# Altium PCB Full bridge-V1.00.PcbDoc (part 1 of 2)
Units mil, origin at the board's own origin, x right, y up, seen from the top; angles counter-clockwise.
Board outline 14960.63 x 6692.91 mil, 2 copper layers (Top Layer, Bottom Layer); 452 components, 175 nets, 980 pads, 0 vias.
Unrouted connection lines stored in the file: 781.
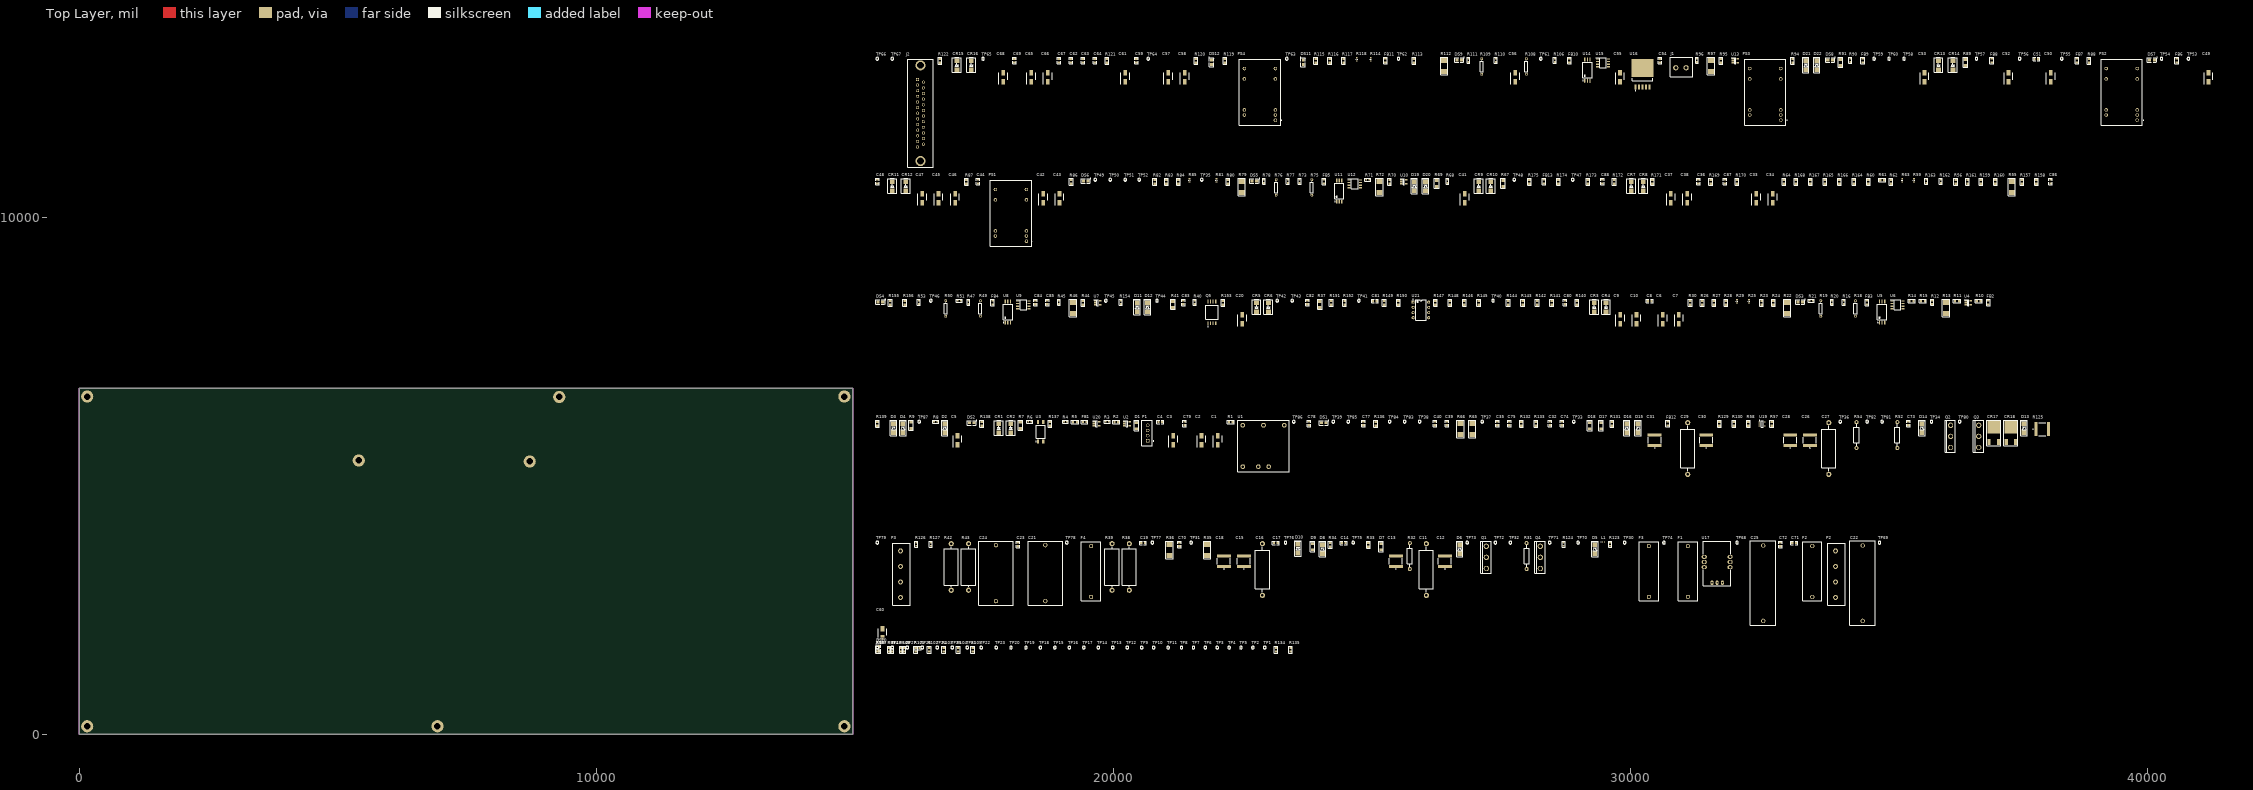
[diagram p0: Top Layer view]
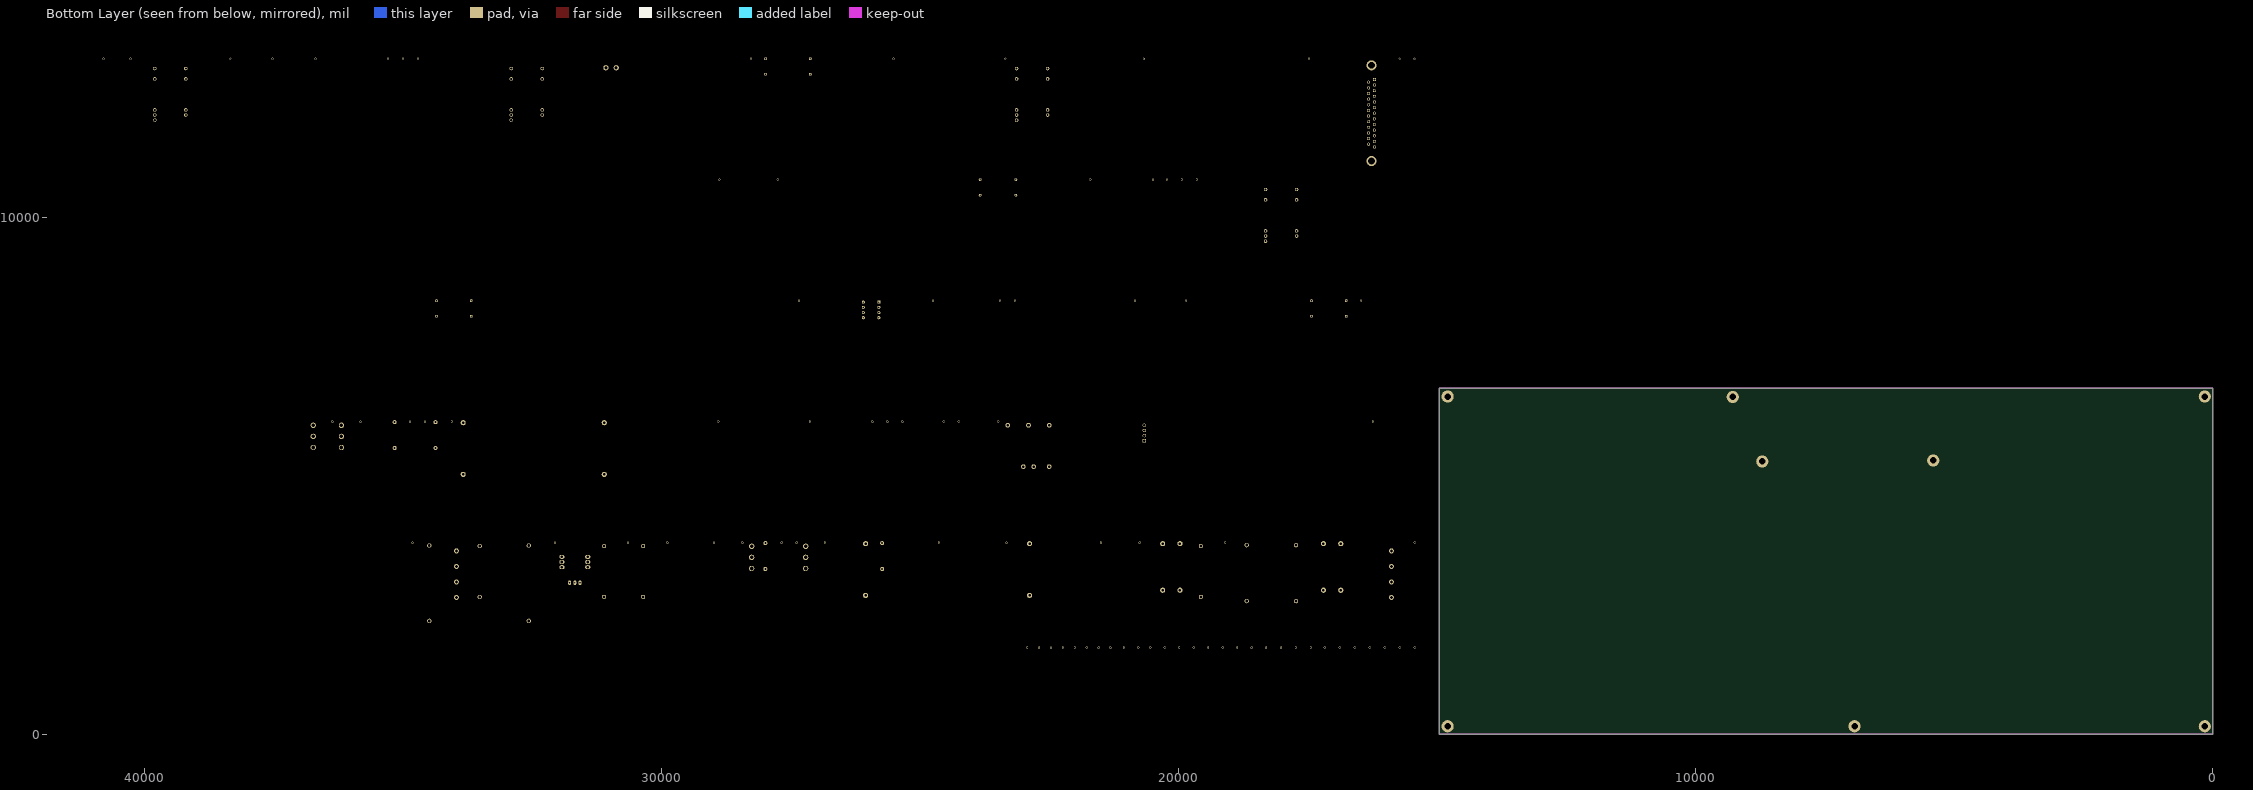
[diagram p1: Bottom Layer view, seen from below]

## Layer stack, top to bottom
Top Solder: solder mask 0.4, Solder Resist, Dk 3.5
Top Layer: signal copper 1.4
Dielectric 1: dielectric 12.6, FR-4, Dk 4.8
Bottom Layer: signal copper 1.4
Bottom Solder: solder mask 0.4, Solder Resist, Dk 3.5

## Board outline
0,0 0,6692.91 14960.63,6692.91 14960.63,0

## Design rules (kind name [scope] priority, off if disabled: settings)
Clearance [All] p1: gap=10 ignorepadtopadclearanceinfootprint=FALSE except(0: Arc-Hole Track-Hole SMDPad-Hole THPad-Hole Via-Hole Fill-Hole Poly-Hole Region-Hole Text-Hole)
PolygonConnect [All] p1: connectstyle=Relief reliefconductorwidth=10 reliefentries=4 polygonreliefangle="90 Angle" airgapwidth=10
RoutingVias [All] p1: holewidth=28 width=50 viastyle="Through Hole" minholewidth=28 minwidth=50 maxholewidth=28 maxwidth=50
SolderMaskExpansion [All] p1: expansion=4 istentingtop=FALSE
Width [All] p1: maxlimit=10 minlimit=10 preferedwidth=10
30 further rules are at their usual default settings.

## Components (designator, comment, footprint, x,y, rotation, side; value= is the part's Value field where it differs from the comment)
C1 "Cap Pol2" CAPAE430X565N 22025,5690 r90 top value=10uF
C2 "Cap Pol2" CAPAE430X565N 21710,5690 r90 top value=10uF
C3 "Cap Pol2" CAPAE430X565N 21165,5690 r90 top value=10uF
C4 "Cap" C0805 20915,6045 r0 top value=10uF-16V
C5 "Cap Pol2" CAPAE430X565N 16990,5690 r90 top value=10uF
C6 "Cap Pol2" CAPAE430X565N 30630,8030 r90 top value=10uF
C7 "Cap Pol2" CAPAE430X565N 30945,8030 r90 top value=10uF
C8 "10uF-50V" C0805 30380,8385 r0 top
C9 "Cap Pol2" CAPAE430X565N 29810,8030 r90 top value=10uF
C10 "Cap Pol2" CAPAE430X565N 30125,8030 r90 top value=10uF
C11 "PWS2101330*D" PWS2101330KD 26060,3190 r90 top
C12 "C2225X103KGRACTU 10n 2000v" C2225_FT 26420,3350 r90 top
C13 "C2225X103KGRACTU 10n 2000v" C2225_FT 25470,3350 r90 top
C14 "10uF-50V" C0805 24460,3705 r0 top
C15 "C2225X103KGRACTU 10n 2000v" C2225_FT 22530,3350 r90 top
C16 "PWS2101330*D" PWS2101330KD 22890,3190 r90 top
C17 "10uF-50V" C0805 23150,3705 r0 top
C18 "C2225X103KGRACTU 10n 2000v" C2225_FT 22145,3350 r90 top
C19 "10uF-50V" C0805 20580,3705 r0 top
C20 "Cap Pol2" CAPAE430X565N 22500,8030 r90 top value=10uF
C21 "MKP1J041006G00KYSD 1uF 630V" MKP10_31x17-P27.5mm 18690,3120 r90 top
C22 "MKP1841410135 0.1uF 1.6kV" MKP1841410135 34500,2925 r90 top
C23 "10uF-50V" C0805 18160,3675 r90 top
C24 "MKP1J041006G00KYSD 1uF 630V" MKP10_31x17-P27.5mm 17735,3120 r90 top
C25 "MKP1841410135 0.1uF 1.6kV" MKP1841410135 32575,2925 r90 top
C26 "C2225X103KGRACTU 10n 2000v" C2225_FT 33480,5690 r90 top
C27 "PWS2101330*D" PWS2101330KD 33845,5530 r90 top
C28 "C2225X103KGRACTU 10n 2000v" C2225_FT 33100,5690 r90 top
C29 "PWS2101330*D" PWS2101330KD 31115,5530 r90 top
C30 "C2225X103KGRACTU 10n 2000v" C2225_FT 31475,5690 r90 top
C31 "C2225X103KGRACTU 10n 2000v" C2225_FT 30475,5690 r90 top
C32 "10uF-50V" C0805 28455,6015 r90 top
C33 "Cap Pol2" CAPAE430X565N 32440,10370 r90 top value=10uF
C34 "Cap Pol2" CAPAE430X565N 32760,10370 r90 top value=10uF
C35 "10uF-50V" C0805 27435,6015 r90 top
C36 "10uF-50V" C0805 31325,10695 r90 top
C37 "Cap Pol2" CAPAE430X565N 30790,10370 r90 top value=10uF
C38 "Cap Pol2" CAPAE430X565N 31105,10370 r90 top value=10uF
C39 "10uF-50V" C0805 26455,6015 r90 top
C40 "10uF-50V" C0805 26225,6015 r90 top
C41 "Cap Pol2" CAPAE430X565N 26805,10370 r90 top value=10uF
C42 "Cap Pol2" CAPAE430X565N 18650,10370 r90 top value=10uF
C43 "Cap Pol2" CAPAE430X565N 18965,10370 r90 top value=10uF
C44 "10uF-50V" C0805 17390,10695 r90 top
C45 "Cap Pol2" CAPAE430X565N 16625,10370 r90 top value=10uF
C46 "Cap Pol2" CAPAE430X565N 16945,10370 r90 top value=10uF
C47 "Cap Pol2" CAPAE430X565N 16310,10370 r90 top value=10uF
C48 "Cap" C0805 15445,10695 r90 top value=10uF-16V
C49 "Cap Pol2" CAPAE430X565N 41190,12710 r90 top value=10uF
C50 "Cap Pol2" CAPAE430X565N 38135,12710 r90 top value=10uF
C51 "Cap" C0805 37860,13065 r0 top value=10uF-16V
C52 "Cap Pol2" CAPAE430X565N 37320,12710 r90 top value=10uF
C53 "Cap Pol2" CAPAE430X565N 35695,12710 r90 top value=10uF
C54 "Cap" C0805 30580,13035 r90 top value=10uF-16V
C55 "Cap Pol2" CAPAE430X565N 29805,12710 r90 top value=10uF
C56 "Cap Pol2" CAPAE430X565N 27780,12710 r90 top value=10uF
C57 "Cap Pol2" CAPAE430X565N 21070,12710 r90 top value=10uF
C58 "Cap Pol2" CAPAE430X565N 21385,12710 r90 top value=10uF
C59 "10uF-50V" C0805 20455,13035 r90 top
C60 "Cap Pol2" CAPAE430X565N 15540,1960 r90 top value=47uF-16V
C61 "Cap Pol2" CAPAE430X565N 20235,12710 r90 top value=10uF
C62 "100nF" C0805 19185,13035 r90 top
C63 "08055C104KAT2A Cap" C0805 19415,13035 r90 top value=10uF-16V
C64 "Cap" C0805 19650,13035 r90 top value=10uF-16V
C65 "Cap Pol2" CAPAE430X565N 18420,12710 r90 top value=10uF
C66 "Cap Pol2" CAPAE430X565N 18735,12710 r90 top value=10uF
C67 "Cap" C0805 18955,13035 r90 top value=10uF-16V
C68 "Cap Pol2" CAPAE430X565N 17875,12710 r90 top value=10uF
C69 "10uF-50V" C0805 18095,13035 r90 top
C70 "Cap" C0805 21285,3675 r90 top value=10nF-16V
C71 "Cap" C0805 33175,3705 r0 top value=10nF-16V
C72 "Cap" C0805 32910,3675 r90 top value=100nF-16V
C73 "Cap" C0805 35385,6015 r90 top value=100nF-16V
C74 "Cap" C0805 28685,6015 r90 top value=10nF-16V
C75 "Cap" C0805 27665,6015 r90 top value=100nF-16V
C77 "Cap" C0805 24845,6015 r90 top value=10nF-16V
C78 "Cap" C0805 23790,6015 r90 top value=10uF-16V
C79 "C2012X5R1E105K125AA" C0805 21385,6015 r90 top
C80 "Cap Pol2" C0805 28745,8355 r90 top value=10uF
C81 "1nF-50V" C0805 25065,8385 r0 top
C82 "Cap Pol2" C0805 23760,8355 r90 top value=10uF
C83 "100nF" C0805 21360,8355 r90 top
C84 "100pF" C0805 18500,8355 r90 top
C85 "100nF" C0805 18730,8355 r90 top
C86 "1nF-50V" C0805 38135,10695 r90 top
C87 "100pF" C0805 31835,10695 r90 top
C88 "100nF" C0805 29465,10695 r90 top
CR1 "SMBJ48A" "SMB (DO-214AA)" 17790,5925 r90 top
CR2 "SMBJ48A" "SMB (DO-214AA)" 18020,5925 r90 top
CR3 "SMBJ48A" "SMB (DO-214AA)" 29305,8265 r90 top
CR4 "SMBJ48A" "SMB (DO-214AA)" 29535,8265 r90 top
CR5 "SMBJ48A" "SMB (DO-214AA)" 22775,8265 r90 top
CR6 "SMBJ48A" "SMB (DO-214AA)" 23005,8265 r90 top
CR7 "SMBJ48A" "SMB (DO-214AA)" 30025,10605 r90 top
CR8 "SMBJ48A" "SMB (DO-214AA)" 30255,10605 r90 top
CR9 "SMBJ48A" "SMB (DO-214AA)" 27075,10605 r90 top
CR10 "SMBJ48A" "SMB (DO-214AA)" 27305,10605 r90 top
CR11 "SMBJ48A" "SMB (DO-214AA)" 15730,10605 r90 top
CR12 "SMBJ48A" "SMB (DO-214AA)" 15990,10605 r90 top
CR13 "SMBJ48A" "SMB (DO-214AA)" 35965,12945 r90 top
CR14 "SMBJ48A" "SMB (DO-214AA)" 36245,12945 r90 top
CR15 "SMBJ48A" "SMB (DO-214AA)" 16980,12945 r90 top
CR16 "SMBJ48A" "SMB (DO-214AA)" 17260,12945 r90 top
CR17 "RFN10BM6STL" RFN10BM 36945,5655 r0 top
CR18 "RFN10BM6STL" RFN10BM 37275,5655 r0 top
D1 "KDZVTR39A" SOD-123FL 20455,5970 r90 top
D2 "VSS8D5M12HM3/H" DO-221AD 16745,5925 r90 top
D3 "1N4007-SMD" "SMA (DO-214AC)" 15755,5925 r90 top
D4 "1N4007-SMD" "SMA (DO-214AC)" 15935,5925 r90 top
D5 "1N4007-SMD" "SMA (DO-214AC)" 29320,3585 r90 top
D6 "1N4007-SMD" "SMA (DO-214AC)" 26705,3585 r90 top
D7 "KDZVTR39A" SOD-123FL 25185,3630 r90 top
D8 "1N4007-SMD" "SMA (DO-214AC)" 24050,3585 r90 top
D9 "KDZVTR39A" SOD-123FL 23860,3630 r90 top
D10 "1N4007-SMD" "SMA (DO-214AC)" 23575,3595 r90 top
D11 "1N4007-SMD" "SMA (DO-214AC)" 20465,8265 r90 top
D12 "1N4007-SMD" "SMA (DO-214AC)" 20665,8265 r90 top
D13 "1N4007-SMD" "SMA (DO-214AC)" 37620,5925 r90 top
D14 "1N4007-SMD" "SMA (DO-214AC)" 35645,5925 r90 top
D15 "1N4007-SMD" "SMA (DO-214AC)" 30155,5925 r90 top
D16 "1N4007-SMD" "SMA (DO-214AC)" 29935,5925 r90 top
D17 "KDZVTR39A" SOD-123FL 29440,5970 r90 top
D18 "KDZVTR39A" SOD-123FL 29220,5970 r90 top
D19 "1N4007-SMD" "SMA (DO-214AC)" 25825,10605 r90 top
D20 "1N4007-SMD" "SMA (DO-214AC)" 26045,10605 r90 top
D21 "1N4007-SMD" "SMA (DO-214AC)" 33400,12945 r90 top
D22 "1N4007-SMD" "SMA (DO-214AC)" 33610,12945 r90 top
DS1 "LED SMD" LED0805 24075,6025 r0 top
DS2 "LED SMD" LED0805 17265,6025 r0 top
DS3 "LED SMD" LED0805 33290,8365 r0 top
DS4 "LED SMD" LED0805 15500,8365 r0 top
DS5 "LED SMD" LED0805 22735,10705 r0 top
DS6 "LED SMD" LED0805 19470,10705 r0 top
DS7 "LED SMD" LED0805 40095,13045 r0 top
DS8 "LED SMD" LED0805 33870,13045 r0 top
DS9 "LED SMD" LED0805 26695,13045 r0 top
DS10 "LED" LED0805 15465,1660 r90 top
DS11 "LED SMD" LED0805 23675,13000 r90 top
DS12 "LED SMD" LED0805 21905,13000 r90 top
F1 "0031.8001 Fuse holder" 00318001 31120,2660 r90 top
F2 "0031.8001 Fuse holder" 00318001 33525,2660 r90 top
F3 "0031.8001 Fuse holder" 00318001 30365,2660 r90 top
F4 "0031.8001 Fuse holder" 00318001 19575,2660 r90 top
FB1 "FERRITE CHIP" L0805 19450,6045 r0 top
FB2 "FBMJ2125HS420-T" L0805 36930,8355 r90 top
FB3 "FERRITE CHIP" L0805 34580,8355 r90 top
FB4 "FERRITE CHIP" L0805 17670,8355 r90 top
FB5 "FERRITE CHIP" L0805 24080,10695 r90 top
FB6 "FERRITE CHIP" L0805 40575,13035 r90 top
FB7 "FERRITE CHIP" L0805 38645,13035 r90 top
FB8 "FERRITE CHIP" L0805 36995,13035 r90 top
FB9 "FERRITE CHIP" L0805 34500,13035 r90 top
FB10 "FERRITE CHIP" L0805 28830,13035 r90 top
FB11 "FERRITE CHIP" L0805 25270,13035 r90 top
FB12 "FBMJ2125HS420-T" L0805 30730,6015 r90 top
FB13 "FBMJ2125HS420-T" L0805 28335,10695 r90 top
J1 "691101710002" 691101710002 30985,12895 r0 top
J2 "61802529221" 61802525123 16220,12670 r90 top
L1 "Inductor" 0402-A 29485,3725 r0 top value="EPCOS ETD39 N87"
P1 "280371-2" TECO-280371-2_V 20670,5830 r90 top
P2 "691311400104" 691311400104 33975,2650 r90 top
P3 "691311400104" 691311400104 15890,2650 r90 top
PS1 "REC5-2415SRWZ/H6/A" REC52415SRWZH6A 18325,9540 r90 top
PS2 "REC5-2415SRWZ/H6/A" REC52415SRWZH6A 39810,11880 r90 top
PS3 "REC5-2415SRWZ/H6/A" REC52415SRWZH6A 32915,11880 r90 top
PS4 "REC5-2415SRWZ/H6/A" REC52415SRWZH6A 23140,11880 r90 top
Q1 "IKW25N120CS7" PG-TO247-3 27220,3425 r90 top
Q2 "IKW25N120CS7" PG-TO247-3 36200,5765 r90 top
Q3 "IKW25N120CS7" PG-TO247-3 36745,5765 r90 top
Q4 "IKW25N120CS7" PG-TO247-3 28265,3425 r90 top
Q5 "ACPL-C87A-500E" FP-SSO-8-MFG 21910,8165 r90 top
R1 "15K" R0805 22280,6045 r0 top
R2 "ResSMD" R0805 20065,6045 r0 top
R3 "Res3" R0603 19885,6050 r0 top value=0
R4 "Res3" R0603 19080,6050 r0 top value=0
R5 "300" R0805 19265,6045 r0 top
R6 "Res3" R0603 18390,6050 r0 top value=0
R7 "12" "MELF 0204" 18210,5980 r90 top value=CMA02040X1209GB300
R8 "Res3" R0603 16570,6050 r0 top value=0
R9 "12" "MELF 0204" 16095,5980 r90 top value=CMA02040X1209GB300
R10 "1K" R0805 36745,8385 r0 top
R11 "ResSMD" R0805 36325,8385 r0 top
R12 "Res3" R0603 35845,8360 r90 top value=0
R13 "CMA02040X1209GB300" MMF50S 36110,8250 r90 top value=1
R14 "ResSMD" R0805 35445,8385 r0 top
R15 "ResSMD" R0805 35665,8385 r0 top
R16 "Res3" R0603 34135,8360 r90 top value=0
R17 "0" R0805 16220,1675 r0 top
R18 "Res1" AXIAL-0.3 34360,8240 r90 top value=1
R19 "Res1" AXIAL-0.3 33690,8240 r90 top value=1
R20 "Res3" R0603 33905,8360 r90 top value=0
R21 "Res3" R0603 33505,8390 r0 top value=0
R22 "CMA02040X1209GB300" MMF50S 33040,8250 r90 top value=1
R23 "5K" R0805 32545,8350 r90 top
R24 "ResSMD" R0805 32775,8350 r90 top
R25 "Res3" J1-0603 32300,8375 r90 top value=10K
R26 "5K" R0805 31395,8350 r90 top
R27 "5K" R0805 31625,8350 r90 top
R28 "1K" R0805 31855,8350 r90 top
R29 "Res3" J1-0603 32070,8375 r90 top value=10K
R30 "47k" R0805 31165,8350 r90 top
R31 "15" AXIAL-0.5 28000,3450 r90 top value=0.5W
R32 "15" AXIAL-0.5 25740,3450 r90 top value=0.5W
R33 "100" R0805 24940,3670 r90 top
R34 "100" R0805 24200,3670 r90 top
R35 "CMA02040X1209GB300" MMF50S 21820,3570 r90 top value=???
R36 "CMA02040X1209GB300" MMF50S 21090,3570 r90 top value=???
R37 "12" "MELF 0204" 24000,8320 r90 top value=CMA02040X1209GB300
R38 "100k" AXIAL0.9-VR68 20315,3240 r90 top value=0.5W
R39 "100k" AXIAL0.9-VR68 19980,3240 r90 top value=0.5W
R40 "Res3" R0603 21580,8360 r90 top value=0
R41 "12" "MELF 0204" 21160,8320 r90 top value=CMA02040X1209GB300
R42 "100k" AXIAL0.9-VR68 16870,3240 r90 top value=0.5W
R43 "100k" AXIAL0.9-VR68 17205,3240 r90 top value=0.5W
R44 "ResSMD" R0805 19420,8350 r90 top
R45 "Res3" R0603 18955,8360 r90 top value=0
R46 "CMA02040X1209GB300" MMF50S 19225,8250 r90 top value=1
R47 "Res3" R0603 17205,8360 r90 top value=0
R48 "0" R0805 15955,1640 r90 top
R49 "Res1" AXIAL-0.3 17435,8240 r90 top value=1
R50 "Res1" AXIAL-0.3 16765,8240 r90 top value=1
R51 "Res3" R0603 17025,8390 r0 top value=0
R52 "15" AXIAL-0.5 35170,5790 r90 top value=0.5W
R53 "Res3" R0603 16245,8360 r90 top value=0
R54 "15" AXIAL-0.5 34380,5790 r90 top value=0.5W
R55 "CMA02040X1209GB300" MMF50S 37385,10590 r90 top value=1
R56 "5K" R0805 36300,10690 r90 top
R57 "100" R0805 32740,6010 r90 top
R58 "100" R0805 32290,6010 r90 top
R59 "Res3" J1-0603 35495,10715 r90 top value=10K
R60 "5K" R0805 34610,10690 r90 top
R61 "5K" R0805 34875,10725 r0 top
R62 "1K" R0805 35050,10690 r90 top
R63 "Res3" J1-0603 35265,10715 r90 top value=10K
R64 "47k" R0805 32980,10690 r90 top
R65 "CMA02040X1209GB300" MMF50S 26950,5910 r90 top value=???
R66 "CMA02040X1209GB300" MMF50S 26720,5910 r90 top value=???
R67 "12" "MELF 0204" 27545,10660 r90 top value=CMA02040X1209GB300
R68 "Res3" R0603 26470,10700 r90 top value=0
R69 "12" "MELF 0204" 26260,10660 r90 top value=CMA02040X1209GB300
R70 "ResSMD" R0805 25350,10690 r90 top
R71 "Res3" R0603 24930,10730 r0 top value=0
R72 "CMA02040X1209GB300" MMF50S 25155,10590 r90 top value=1
R73 "Res3" R0603 23610,10700 r90 top value=0
R74 "0" R0805 15725,1640 r90 top
R75 "Res1" AXIAL-0.3 23845,10580 r90 top value=1
R76 "Res1" AXIAL-0.3 23155,10580 r90 top value=1
R77 "Res3" R0603 23380,10700 r90 top value=0
R78 "Res3" R0603 22920,10700 r90 top value=0
R79 "CMA02040X1209GB300" MMF50S 22490,10590 r90 top value=1
R80 "5K" R0805 22225,10690 r90 top
R81 "Res3" J1-0603 22000,10715 r90 top value=10K
R82 "5K" R0805 20805,10690 r90 top
R83 "5K" R0805 21035,10690 r90 top
R84 "1K" R0805 21265,10690 r90 top
R85 "Res3" J1-0603 21480,10715 r90 top value=10K
R86 "47k" R0805 19190,10690 r90 top
R87 "15K" R0805 17165,10690 r90 top
R88 "15K" R0805 38880,13030 r90 top
R89 "12" "MELF 0204" 36485,13000 r90 top value=CMA02040X1209GB300
R90 "Res3" R0603 34260,13040 r90 top value=0
R91 "12" "MELF 0204" 34070,13000 r90 top value=CMA02040X1209GB300
R92 "0Ohm 805" R0805 15445,1640 r90 top
R93 "0Ohm 805" R0805 15675,1640 r90 top
R94 "15K" R0805 33145,13030 r90 top
R95 "ResSMD" R0805 31760,13030 r90 top
R96 "Res3" R0603 31295,13040 r90 top value=0
R97 "CMA02040X1209GB300" MMF50S 31565,12930 r90 top value=1
R98 "10K" R0805 15445,1640 r90 top
R99 "10K" R0805 15675,1640 r90 top
R100 "10K" R0805 15905,1640 r90 top
R101 "10K" R0805 16185,1640 r90 top
R102 "10K" R0805 16445,1640 r90 top
R103 "10K" R0805 16725,1640 r90 top
R104 "10K" R0805 17005,1640 r90 top
R105 "10K" R0805 17285,1640 r90 top
R106 "Res3" R0603 28545,13040 r90 top value=0
R107 "0" R0805 15445,1640 r90 top
R108 "Res1" AXIAL-0.3 27995,12920 r90 top value=1
R109 "Res1" AXIAL-0.3 27130,12920 r90 top value=1
R110 "Res3" R0603 27405,13040 r90 top value=0
R111 "Res3" R0603 26875,13040 r90 top value=0
R112 "CMA02040X1209GB300" MMF50S 26405,12930 r90 top value=1
R113 "5K" R0805 25820,13030 r90 top
R114 "Res3" J1-0603 24985,13055 r90 top value=10K
R115 "5K" R0805 23920,13030 r90 top
R116 "5K" R0805 24190,13030 r90 top
R117 "1K" R0805 24460,13030 r90 top
R118 "Res3" J1-0603 24715,13055 r90 top value=10K
R119 "15K" R0805 22165,13030 r90 top
R120 "47k" R0805 21605,13030 r90 top
R121 "1K" R0805 19880,13030 r90 top
R122 "1K" R0805 16650,13030 r90 top
R123 "Res3" R0603 29615,3680 r90 top value=0
R124 "Res3" R0603 28715,3680 r90 top value=0
R125 "MOVS2825V420" MOVS2825V420 37970,5905 r0 top
R126 "0" R0603 16195,3680 r90 top
R127 "15k" R0603 16475,3680 r90 top
R129 "4.7k" R0805 31730,6010 r90 top
R130 "4.7k" R0805 32010,6010 r90 top
R131 "100" R0805 29650,6010 r90 top
R132 "4.7k" R0805 27900,6010 r90 top
R133 "4.7k" R0805 28180,6010 r90 top
R134 "0" R0805 23155,1640 r90 top
R135 "0" R0805 23435,1640 r90 top
R136 "Res1" R0805 25080,6010 r90 top value=15k
R137 "1K" R0805 18780,6010 r90 top
R138 "1K" R0805 17460,6010 r90 top
R139 "1K" R0805 15445,6010 r90 top
R140 "0 SMD" R0805 28975,8350 r90 top
R141 "0 SMD" R0805 28485,8350 r90 top
R142 "0 SMD" R0805 28205,8350 r90 top
R143 "ResSMD" R0805 27925,8350 r90 top
R144 "0 SMD" R0805 27645,8350 r90 top
R145 "0 SMD" R0805 27075,8350 r90 top
R146 "0 SMD" R0805 26795,8350 r90 top
R147 "ResSMD" R0805 26235,8350 r90 top
R148 "ResSMD" R0805 26515,8350 r90 top
R149 "ResSMD" R0805 25245,8350 r90 top
R150 "ResSMD" R0805 25520,8350 r90 top
R151 "ResSMD" R0805 24220,8350 r90 top
R152 "ResSMD" R0805 24480,8350 r90 top
R153 "ResSMD" R0805 22125,8350 r90 top
R154 "Res3" R0603 20150,8360 r90 top value=0
R155 "ResSMD" R0805 15690,8350 r90 top
R156 "ResSMD" R0805 15970,8350 r90 top
R157 "ResSMD" R0805 37580,10690 r90 top
R158 "ResSMD" R0805 37860,10690 r90 top
R159 "ResSMD" R0805 36790,10690 r90 top
R160 "0 SMD" R0805 37070,10690 r90 top
R161 "ResSMD" R0805 36530,10690 r90 top
R162 "Res3" R0603 36010,10700 r90 top value=0
R163 "Res3" R0603 35730,10700 r90 top value=0
R164 "ResSMD" R0805 34330,10690 r90 top
R165 "ResSMD" R0805 33770,10690 r90 top
R166 "ResSMD" R0805 34050,10690 r90 top
R167 "0 SMD" R0805 33490,10690 r90 top
R168 "0 SMD" R0805 33210,10690 r90 top
R169 "ResSMD" R0805 31560,10690 r90 top
R170 "ResSMD" R0805 32070,10690 r90 top
R171 "0 SMD" R0805 30435,10690 r90 top
R172 "0 SMD" R0805 29695,10690 r90 top
R173 "ResSMD" R0805 29185,10690 r90 top
R174 "ResSMD" R0805 28615,10690 r90 top
R175 "ResSMD" R0805 28055,10690 r90 top
TP1 "Pad" TP-0.5mm 22935,1680 r0 top
TP2 "Pad" TP-0.5mm 22705,1680 r90 top
TP3 "Pad" TP-0.5mm 22015,1680 r90 top
TP4 "Pad" TP-0.5mm 22245,1680 r90 top
TP5 "Pad" TP-0.5mm 22475,1680 r90 top
TP6 "Pad" TP-0.5mm 21785,1680 r90 top
TP7 "Pad" TP-0.5mm 21555,1680 r90 top
TP8 "Pad" TP-0.5mm 21325,1680 r90 top
TP9 "Pad" TP-0.5mm 20555,1680 r90 top
TP10 "Pad" TP-0.5mm 20785,1680 r90 top
TP11 "Pad" TP-0.5mm 21065,1680 r90 top
TP12 "Pad" TP-0.5mm 20275,1680 r90 top
TP13 "Pad" TP-0.5mm 19995,1680 r90 top
TP14 "Pad" TP-0.5mm 19715,1680 r90 top
TP15 "Pad" TP-0.5mm 18875,1680 r90 top
TP16 "Pad" TP-0.5mm 19155,1680 r90 top
TP17 "Pad" TP-0.5mm 19435,1680 r90 top
TP18 "Pad" TP-0.5mm 18595,1680 r90 top
TP19 "Pad" TP-0.5mm 18315,1680 r90 top
TP20 "Pad" TP-0.5mm 18025,1680 r90 top
TP21 "Pad" TP-0.5mm 17180,1680 r90 top
TP22 "Pad" TP-0.5mm 17450,1680 r90 top
TP23 "Pad" TP-0.5mm 17740,1680 r90 top
TP24 "Pad" TP-0.5mm 16600,1680 r90 top
TP25 "Pad" TP-0.5mm 16890,1680 r90 top
TP26 "Pad" TP-0.5mm 16310,1680 r90 top
TP27 "Pad" TP-0.5mm 16020,1680 r90 top
TP28 "Pad" TP-0.5mm 15730,1680 r90 top
TP29 "Pad" TP-0.5mm 15440,1680 r90 top
TP30 "Pad" TP-0.5mm 29895,3710 r90 top
TP31 "Pad" TP-0.5mm 21510,3710 r90 top
TP32 "Pad" TP-0.5mm 27685,3710 r90 top
TP33 "Pad" TP-0.5mm 28910,6050 r90 top
TP34 "Pad" TP-0.5mm 35830,6050 r90 top
TP35 "Pad" TP-0.5mm 21715,10730 r90 top
TP36 "Pad" TP-0.5mm 34065,6050 r90 top
TP37 "Pad" TP-0.5mm 27140,6050 r90 top
TP38 "Pad" TP-0.5mm 25930,6050 r90 top
TP39 "Pad" TP-0.5mm 24260,6050 r90 top
TP40 "Pad" TP-0.5mm 27350,8390 r90 top
TP41 "Pad" TP-0.5mm 24755,8390 r90 top
TP42 "Pad" TP-0.5mm 23175,8390 r90 top
TP43 "Pad" TP-0.5mm 23465,8390 r90 top
TP44 "Pad" TP-0.5mm 20850,8390 r90 top
TP45 "Pad" TP-0.5mm 19860,8390 r90 top
TP46 "Pad" TP-0.5mm 16475,8390 r90 top
TP47 "Pad" TP-0.5mm 28890,10730 r90 top
TP48 "Pad" TP-0.5mm 27760,10730 r90 top
TP49 "Pad" TP-0.5mm 19655,10730 r90 top
TP50 "Pad" TP-0.5mm 19945,10730 r90 top
TP51 "Pad" TP-0.5mm 20235,10730 r90 top
TP52 "Pad" TP-0.5mm 20505,10730 r90 top
TP53 "Pad" TP-0.5mm 40800,13070 r90 top
TP54 "Pad" TP-0.5mm 40280,13070 r90 top
TP55 "Pad" TP-0.5mm 38350,13070 r90 top
TP56 "Pad" TP-0.5mm 37535,13070 r90 top
TP57 "Pad" TP-0.5mm 36700,13070 r90 top
TP58 "Pad" TP-0.5mm 35300,13070 r90 top
TP59 "Pad" TP-0.5mm 34720,13070 r90 top
TP60 "Pad" TP-0.5mm 35010,13070 r90 top
TP61 "Pad" TP-0.5mm 28275,13070 r90 top
TP62 "Pad" TP-0.5mm 25520,13070 r90 top
TP63 "Pad" TP-0.5mm 23360,13070 r90 top
TP64 "Pad" TP-0.5mm 20680,13070 r90 top
TP65 "Pad" TP-0.5mm 17485,13070 r90 top
TP66 "Pad" TP-0.5mm 15440,13070 r90 top
TP67 "Pad" TP-0.5mm 15730,13070 r90 top
TP68 "Pad" TP-0.5mm 32070,3710 r90 top
TP69 "Pad" TP-0.5mm 34825,3710 r90 top
TP70 "Pad" TP-0.5mm 28995,3710 r90 top
TP71 "Pad" TP-0.5mm 28445,3710 r90 top
TP72 "Pad" TP-0.5mm 27395,3710 r90 top
TP73 "Pad" TP-0.5mm 26850,3710 r90 top
TP74 "Pad" TP-0.5mm 30655,3710 r90 top
TP75 "Pad" TP-0.5mm 24645,3710 r90 top
TP76 "Pad" TP-0.5mm 23335,3710 r90 top
TP77 "Pad" TP-0.5mm 20760,3710 r90 top
TP78 "Pad" TP-0.5mm 19105,3710 r90 top
TP79 "Pad" TP-0.5mm 15440,3710 r90 top
TP80 "Pad" TP-0.5mm 36375,6050 r90 top
TP81 "Pad" TP-0.5mm 34875,6050 r90 top
TP82 "Pad" TP-0.5mm 34585,6050 r90 top
TP83 "Pad" TP-0.5mm 25640,6050 r90 top
TP84 "Pad" TP-0.5mm 25350,6050 r90 top
TP85 "Pad" TP-0.5mm 24550,6050 r90 top
TP86 "Pad" TP-0.5mm 23495,6050 r90 top
TP87 "Pad" TP-0.5mm 16250,6050 r90 top
U1 "MJWI10-24S12-MIN" MJWI10-24S12 23010,5180 r0 top
U2 "SN74LVC1G17DBVT SOT23" SOT95P280X145-5N 20270,6010 r0 top
U3 "PC81713NIP1B" SOP-4L 18550,5665 r90 top
U4 "SN74LVC1G17DBVT SOT23" SOT95P280X145-5N 36540,8350 r0 top
U5 "SI8261BBD-C-ISR" SLAB-SDIP6_N 34875,8170 r90 top
U6 "IXDN609SIATR" IXDN609SIATR 35175,8310 r0 top
U7 "SN74LVC1G17DBVT SOT23" SOT95P280X145-5N 19700,8350 r0 top
U8 "SI8261BBD-C-ISR" SLAB-SDIP6_N 17965,8170 r90 top
U9 "IXDN609SIATR" IXDN609SIATR 18265,8310 r0 top
U10 "SN74LVC1G17DBVT SOT23" SOT95P280X145-5N 25625,10690 r0 top
U11 "SI8261BBD-C-ISR" SLAB-SDIP6_N 24375,10510 r90 top
U12 "IXDN609SIATR" IXDN609SIATR 24675,10650 r0 top
U13 "SN74LVC1G17DBVT SOT23" SOT95P280X145-5N 32035,13030 r0 top
U14 "SI8261BBD-C-ISR" SLAB-SDIP6_N 29175,12850 r90 top
U15 "IXDN609SIATR" IXDN609SIATR 29475,12990 r0 top
U16 "LT1764AEQ-3.3" LT1764AEQ33TRPBF 30240,12770 r0 top
U17 "CAS 15-NP" "CAS 15-NP" 31935,3235 r90 top
U19 "TLV2781IDBVR" DBV0005A_L 32555,6005 r0 top
U20 "NCV8114ASN165T1G" TSOP-5 19680,6010 r0 top
U21 "OPA27GP" P0008A 25955,8210 r0 top

## Footprints (in the part's own frame and the unit in brackets; to place one, negate y for a bottom-side part, rotate by r counter-clockwise, add the part's x,y. Pads: shape width x height; smd on the part's side, far side on the other; paste and mask are expansions set on the pad)
0402-A [mm] "Chip Inductor, Body 1.0x0.5mm, IPC High Density"
  rect 0.6x0.5 smd: 1(-0.5,0) 2(0.5,0)
  silkscreen extent -1.1,-0.15 -1.1,0.15, body extent -0.55,-0.3 0.55,0.3, height 0.55
00318001 [mm]
  round 2.1 hole 1.4: 1(0,0) 2(25,0)
  silkscreen extent -2,-4.75 27,4.75, body extent -2,-4.75 27,4.75, height 16.1
61802525123 [mm]
  rect 1.5x1.5 hole 1: 1(0,0)
  round 1.5 hole 1: 2(-2.77,0) 3(-5.54,0) 4(-8.31,0) 5(-11.08,0) 6(-13.85,0) 7(-16.62,0) 8(-19.39,0) 9(-22.16,0) 10(-24.93,0) 11(-27.7,0) 12(-30.47,0) 13(-33.24,0) 14(-1.385,-2.84) 15(-4.155,-2.84) 16(-6.925,-2.84) 17(-9.695,-2.84) 18(-12.465,-2.84) 19(-15.235,-2.84) 20(-18.005,-2.84) 21(-20.775,-2.84) 22(-23.545,-2.84) 23(-26.315,-2.84) 24(-29.085,-2.84) 25(-31.855,-2.84)
  round 4.95 hole 3.3: MH1(6.9,-1.42) MH2(-40.14,-1.42)
  silkscreen extent -43.14,-7.67 9.9,4.83, body extent -43.14,-7.67 9.9,4.83, height 11.15
691101710002 [mm]
  round 2.54 hole 1.5 mask+0.15: 1(-2.54,0) 2(2.54,0)
  silkscreen extent -5.3,-4.3 5.71,5.2, body extent -5,-4.05 5.5,4.95, height 12.5
691311400104 [mm]
  round 2.4 hole 1.6: 1(0,0) 2(7.62,0) 3(15.24,0) 4(22.86,0)
  silkscreen extent -3.81,-4.7 26.67,3.8, body extent -3.81,-4.7 26.67,3.8, height 12.25
AXIAL0.9-VR68 [mil]
  round 100 hole 48: 1(-450,0) 2(450,0)
  silkscreen extent -380,-138 390,138
AXIAL-0.3 [mm] "Axial Device, Thru-Hole; 2 Leads; 0.3 in Pin Spacing"
  round 1.4 hole 0.85: 1(-3.81,0) 2(3.81,0)
  silkscreen extent -2.77,-0.76 2.77,0.76
AXIAL-0.5 [mm] "Axial Device, Thru-Hole; 2 Leads; 0.5 in Pin Spacing"
  round 2 hole 1: 1(-6.35,0) 2(6.35,0)
  silkscreen extent -5.33,-1.27 5.33,1.27
C0805 [mm] "0805"
  rect 1.1x1.32 smd: 1(-0.925,0) 2(0.925,0)
  silkscreen extent -1.68,-0.86 1.68,0.86, body extent -1,-0.62 1,0.63, height 0.78
C2225_FT [mm]
  rect 1.6x6.8 smd: 1(-2.6,0) 2(2.6,0)
  silkscreen extent -3.9,-3.2 1.52,3.2, body extent -10,-3.38 10,3.38, height 5.8
CAPAE430X565N [mm]
  rect 2.65x1.8 smd: 1(-2.2,0) 2(2.2,0)
  silkscreen extent -3.52,-2.15 2.15,2.15, body extent -10,-3.38 10,3.38, height 5.8
"CAS 15-NP" [mm]
  oval 1.9x2.54 hole 1.3: 1(0,0) 2(2.54,0) 3(5.08,0) 8(5.08,12.7) 9(2.54,12.7) 10(0,12.7)
  oval 2.3x1.4 hole 0.9: 11(-7.62,8.89) 12(-7.62,6.35) 13(-7.62,3.81)
  silkscreen extent -9.17,-0.39 12.74,13.11
DBV0005A_L [mm] "SOT23, 5-Leads, Body 3.05x1.75mm, Pitch 0.95mm, IPC High Density"
  rrect18% 0.8x0.55 smd: 1(-1.275,0.95) 2(-1.275,0) 3(-1.275,-0.95) 4(1.275,-0.95) 5(1.275,0.95)
  silkscreen extent -1.4,-1.55 0.5,1.9, body extent -1.42,-1.46 1.42,1.46, height 1.08
DO-221AD [mm]
  rect 2.3x2.3 smd: 1(-2.2,0) 2(2.2,0)
  silkscreen extent -3.65,-1.55 3.95,1.55, body extent -2.6,-1.3 2.6,1.3, height 2.4
FP-SSO-8-MFG [mm]
  rect 1.905x0.64 smd paste+0 mask+0: 1(-5.372,1.905) 2(-5.372,0.635) 3(-5.372,-0.635) 4(-5.372,-1.905) 5(5.372,-1.905) 6(5.372,-0.635) 7(5.372,0.635) 8(5.372,1.905)
  silkscreen extent -7.04,-3.05 3.47,3.05, body extent -6.43,-3.15 6.43,3.15, height 0.25
IXDN609SIATR [mm]
  rect 1.532x0.65 smd: 1(-2.734,1.905) 2(-2.734,0.635) 3(-2.734,-0.635) 4(-2.734,-1.905) 5(2.734,-1.905) 6(2.734,-0.635) 7(2.734,0.635) 8(2.734,1.905)
  silkscreen extent -3.5,-2.46 1.62,2.58, body extent -3,-2.46 3,2.46, height 1.68
J1-0603 [mm] "Chip Resistor, Body 1.6x0.8mm, IPC High Density"
  rect 0.7x0.9 smd: 1(-0.75,0) 2(0.75,0)
  silkscreen extent -0.2,-0.35 0.2,0.35, body extent -0.85,-0.48 0.85,0.48, height 0.9
L0805 [mm] "0805"
  rect 1x1.3 smd: 1(-0.9,0) 2(0.9,0)
  silkscreen extent -1.6,-0.89 1.6,0.89, body extent -0.93,-0.62 1.07,0.63, height 0.47
LED0805 [mil] "LED-0805"
  rect 60x50 smd: 1(-45.28,0) 2(45.28,0)
  silkscreen extent -88,-45 100,52, body extent -40,-25 40,25, height 43
LT1764AEQ33TRPBF [mil]
  rect 42.01x90 smd: 1(-134.02,-247.72) 2(-67.01,-247.72) 3(0,-247.72) 4(67.01,-247.72) 5(134.02,-247.72)
  rect 420x350 smd: 6(0,117.28)
  silkscreen extent -195,-315 195,-83
"MELF 0204" [mm]
  rect 1.5x1.8 smd: 1(-1.5,0) 2(1.5,0)
  silkscreen extent -2.54,-1.14 2.54,1.14, body extent -1.82,-0.7 1.78,0.7, height 1.4
MJWI10-24S12 [mm]
  round 2.3 hole 1.3: 1(0,0) 2(-5.08,0) 3(7.62,20.32) 4(-2.54,20.32) 5(-12.7,20.32) 6(-12.7,0)
  silkscreen extent -15.24,-2.54 10.16,22.86
MKP10_31x17-P27.5mm [mm]
  round 2.1 hole 1.4: 1(-13.75,0) 2(13.75,0)
  silkscreen extent -15.75,-8.5 15.75,8.5
MKP1841410135 [mm]
  round 2.1 hole 1.4: 1(-18.5,0) 2(18.5,0)
  silkscreen extent -20.75,-6.25 20.75,6.25
MMF50S [mm]
  rect 2.5x3 smd: 1(-2.75,0) 2(2.75,0)
  silkscreen extent -4.32,-1.78 4.32,1.78
MOVS2825V420 [mm]
  rect 1.5x6.8 smd: 1(-3.05,0) 2(3.05,0)
  silkscreen extent -4.5,-3.2 1.75,3.2
P0008A [mm] "DIP, 8-Leads, Body 10.15x6.6mm, Pitch 2.54mm"
  rect 1.5x1.5 hole 0.9: 1(-3.81,3.81)
  round 1.5 hole 0.9: 2(-3.81,1.27) 3(-3.81,-1.27) 4(-3.81,-3.81) 5(3.81,-3.81) 6(3.81,-1.27) 7(3.81,1.27) 8(3.81,3.81)
  silkscreen extent -3.93,-5.1 2.65,5.23, body extent -3.95,-5.07 3.95,5.07, height 5.08
PG-TO247-3 [mm]
  round 2.6 hole 1.8: 1(-5.44,0) 2(0,0) 3(5.44,0)
  silkscreen extent -7.9,-2.4 7.9,2.7, body extent -7.79,-2.4 7.79,2.59, height 24.1
PWS2101330KD [mil]
  round 100 hole 48: 1(-500,0) 2(500,0)
  silkscreen extent -440,-138 440,138
R0603 [mm] "0603"
  rect 0.9x1 smd: 1(-0.8,0) 2(0.8,0)
  silkscreen extent -1.45,-0.7 1.45,0.7, body extent -0.8,-0.4 0.8,0.4, height 0.37
R0805 [mm] "0805"
  rect 1.1x1.35 smd: 1(-0.953,0) 2(0.953,0)
  silkscreen extent -1.75,-0.9 1.75,0.9, body extent -1,-0.63 1,0.63, height 0.47
REC52415SRWZH6A [mm]
  round 1.7 hole 1: 1(0,0) 2(2.54,0) 3(5.08,0) 9(20.32,0) 11(25.4,0) 14(25.4,15.24) 16(20.32,15.24) 22(5.08,15.24) 23(2.54,15.24)
  silkscreen extent -2.54,-3.1 30,17.78, body extent -10,-3.38 10,3.38, height 5.8
RFN10BM [mm]
  rect 1.6x3 smd: 1(0,0) 1(4.6,0)
  rect 6x6.2 smd: 2(2.3,7.264)
  silkscreen extent -1.17,-1.83 5.71,10.72, body extent -0.97,-0.51 5.57,9.43, height 2.41
SLAB-SDIP6_N [mm] "SOP, 6-Leads, Body 7.5x4.58mm, Pitch 1.27mm, IPC Medium Density"
  oval 2.05x0.6 smd: 1(-5.2,1.27) 2(-5.2,0) 3(-5.2,-1.27) 4(5.2,-1.27) 5(5.2,0) 6(5.2,1.27)
  silkscreen extent -5.32,-2.3 3.78,2.3, body extent -3.75,-2.3 3.75,2.3, height 2.65
"SMA (DO-214AC)" [mm]
  rect 2.3x2.3 smd: 1(-2.2,0) 2(2.2,0)
  silkscreen extent -3.65,-1.55 3.95,1.55, body extent -2.6,-1.3 2.6,1.3, height 2.4
"SMB (DO-214AA)" [mm]
  rect 2.2x2.3 smd: 1(-2.2,0) 2(2.2,0)
  silkscreen extent -3.6,-2.18 3.91,2.18, body extent -2.74,-1.94 2.85,2.01, height 2.6
SOD-123FL [mm] "SOD-123FL"
  rect 1.34x1.8 smd: 1(-1.45,0) 2(1.45,0)
  silkscreen extent -2.35,-1.14 2.75,1.14, body extent -1.85,-0.78 1.85,0.77, height 1.35
SOP-4L [mm] "Small Outline; 6 Leads (1 Absent); Body Width 4.4 mm; Pitch 1.27 mm"
  rect 2x1 smd: 1(0,0) 2(0,-2.54) 3(9.5,-2.54) 4(9.5,0)
  silkscreen extent -0.15,-3.42 8,1.17, body extent -0.3,-3.3 9.9,0.8, height 2.1
SOT95P280X145-5N [mm]
  rect 1.2x0.6 smd: 1(-1.25,0.95) 2(-1.25,0) 3(-1.25,-0.95) 4(1.25,-0.95) 5(1.25,0.95)
  silkscreen extent -1.85,-1.45 0.3,1.5, body extent -1.4,-1.45 1.4,1.45, height 1.45
TECO-280371-2_V [mm] "Male Header, 4-Leads, Body 12.7x5mm, Pitch 2.54"
  rect 1.65x1.65 hole 1.15: 1(-3.81,0)
  round 1.65 hole 1.15: 2(-1.27,0) 3(1.27,0) 4(3.81,0)
  silkscreen extent -6.35,-2.98 6.35,2.8, body extent -6.22,-2.21 6.23,2.79, height 12.6
TP-0.5mm [mm]
  round 1 hole 0.5: 1(0,0)
  silkscreen extent -0.7,-0.7 0.7,0.7
TSOP-5 [mm]
  rect 1.2x0.6 smd: 1(-1.25,0.95) 2(-1.25,0) 3(-1.25,-0.95) 4(1.25,-0.95) 5(1.25,0.95)
  silkscreen extent -1.85,-1.45 0.3,1.5, body extent -1.4,-1.45 1.4,1.45, height 1.45

## Part data
C1 C2 C3 C5 C6 C7 C9 C10 C20 C33 C34 C37 C38 C41 C42 C43 C45 C46 C47 C49 C50 C52 C53 C55 C56 C57 C58 C60 C61 C65 C66 C68 C80 C82: "Polarized Capacitor (Axial)", LatestRevisionDate=17-Jul-2002, LatestRevisionNote="Re-released for DXP Platform.", PackageReference=POLAR0.8, Published=8-Jun-2000, Publisher="Altium Limited"
C4 C48 C51 C54 C64 C67 C70 C71 C72 C73 C74 C75 C77 C78: "Capacitor", LatestRevisionDate=17-Jul-2002, LatestRevisionNote="Re-released for DXP Platform.", PackageReference=RAD-0.3, Published=8-Jun-2000, Publisher="Altium Limited"
C8 C14 C17 C19 C21 C22 C23 C24 C25 C32 C35 C36 C39 C40 C44 C59 C69 C81 C86: library part CapSMD
C11 C12 C13 C15 C16 C18 C26 C27 C28 C29 C30 C31: library part "Ceramic disk capacitor", Package="0805 AVX", Availability=Warning, MF=AVX, MP=LD052C153JAB2A, Price=None, SnapEDA_Link=https://www.snapeda.com/parts/LD052C153JAB2A/AVX/view-part/2034833/?ref=snap
C62: library part "Cap ceramic", "None polar capacitor", Volte=16v
C63: library part Cap, "Capacitor", LatestRevisionDate=17-Jul-2002, LatestRevisionNote="Re-released for DXP Platform.", PackageReference=RAD-0.3, Published=8-Jun-2000, Publisher="Altium Limited"
C79: library part CMP-08246-005389-1, "Multilayer Ceramic Capacitors 1μF ±10% 25V X5R SMD 0805", Capacitance=1uF, Case Code (Imperial)=0805, Case Code (Metric)=2012, Dielectric=X5R, Dielectric Material=Ceramic, Max Operating Temperature=85°C, Min Operating Temperature=-55°C, Package Quantity=2000, Tolerance=10%, Voltage=25V, Case/Package=0805, Construction=Flat, Depth=1.25mm, Height=1.25mm, Lead Free="Lead Free", Length=2mm, Mount="Surface Mount", Number of Pins=2, Packaging="Tape and Reel", Radiation Hardening=No, REACH SVHC="No SVHC", Resistor Type=Ceramic, RoHS Compliant=Yes, Series=C, Termination=SMD/SMT, Thickness=0.057inch, Voltage Rating=25V, Voltage Rating (DC)=25V, Weight=0.000194oz, Width=0.049inch
C83 C84 C85 C87 C88: library part "Cap ceramic", "None polar capacitor", Volte=50v
CR1 CR2 CR3 CR4 CR5 CR6 CR7 CR8 CR9 CR10 CR11 CR12 CR13 CR14 CR15 CR16 CR17 CR18: library part DiodeSMD4.5mm
D1 D7 D9 D17 D18: library part "D Zener", "Zener Diode", LatestRevisionDate=17-Jul-2002, LatestRevisionNote="Re-released for DXP Platform.", PackageDescription="Diode, Thru-Hole; 2 Leads; 0.7 in Pin Spacing", PackageReference=DIODE-0.7, Published=8-Jun-2000, Publisher="Altium Limited"
D2: library part "D Schottky", "Schottky Diode", Code_JEDEC=DO-214-AA, LatestRevisionDate=17-Jul-2002, LatestRevisionNote="Re-released for DXP Platform.", PackageDescription="DO-214-AA/SMB; 2 C-Bend Leads; Body 5.3 x 3.6 mm, inc. leads (LxW)", PackageReference=SMB, Published=8-Jun-2000, Publisher="Altium Limited"
D3 D4 D5 D6 D8 D10 D11 D12 D13 D14 D15 D16 D19 D20 D21 D22: library part 1N4007, "Diode Standard 1000V 1A Through Hole DO-204AL _DO-41_", Package="DO-41 Good-Ark", Availability=Unavailable, MF="ON Semiconductor", MP=1N4007, Price=None, SnapEDA_Link=https://www.snapeda.com/parts/1N4007/ON%20Semiconductor/view-part/2816213/?ref=snap
DS2 DS3 DS4 DS5 DS9 DS12: library part LED, "Blue SURFACE MOUNT LED LAMP, -40 to +85 ,0805 SIZE", MANUFACTURE="Fairchild Semiconductor", PART NUMBER=QTLP630C-7
F1 F2 F3 F4: library part "Fuse 1", "Fuse", LatestRevisionDate=17-Jul-2002, LatestRevisionNote="Re-released for DXP Platform.", PackageDescription="Thru-Hole; 2 Leads", PackageReference=PIN-W2/E2.8, Published=8-Jun-2000, Publisher="Altium Limited"
FB2 FB12 FB13: library part "FERRITE CHIP"
J1: "WR-TBL Series 101 Horizontal Entry Modular, THT, pitch 5mm, 2p", Manufacturer="Wurth Elektronik", Operating Temperature Max=105°C, Operating Temperature Min=-40°C, Rated Current=16A, Working Voltage=250V, Application="Pressure Clamp", Category="Terminal Blocks", ComponentLink1Description="Website Link", ComponentLink1URL=https://www.we-online.com/redexpert/article/691101710002?ad, ComponentLink2Description="Datasheet Link", ComponentLink2URL=https://www.we-online.com/redexpert/spec/691101710002?ad, Manufacturer Part Number=691101710002, Match Code=WR-TBL, Modularity=Yes, Mount="Through Hole", Number of Pins=2, Number of Rows=1, Orientation=Horizontal, Packaging=Box, Pitch=5mm
J2: library part CMP-1502-00282-1, "Male PCB Connector with Hex Screw WR-DSUB, Vertical, 25 pins", Contact Resistance=30mOhm, Manufacturer="Wurth Elektronik", Operating Temperature=-40to85degC, Rated Current=3A, Working Voltage=125VAC, Datasheet URL=https://katalog.we-online.de/em/datasheet/6180xx29221.pdf, Gender=Male, Manufacturer URL=http://www.we-online.de, Mounting Technology=THT, Orientation=Vertical, Package Reference=61802529221, Packaging=Tray, PART NUMBER=61802529221, Pin Number=25, Publisher=WurthElektronik
P1: library part CMP-2000-05548-1, "Male Header, Pitch 2.54 mm, 1 x 4 Position, Height 12.8 mm, Tail Length 3.5 mm, -55 to 105 degC, RoHS, Bulk", Color=Black, Manufacturer="TE Connectivity", Package Description="Male Header, Pitch 2.54 mm, 1 x 4 Position, Height 12.8 mm, Tail Length 3.5 mm", Standard Package=1,000, 3D Model=280371-2.pdf, Category=Connectors,Interconnects, Connector Type=Header,Shrouded, Contact Finish=Gold, Contact Finish Thickness=15µin(0.38µm), Contact Mating Length="0.260\"(6.60mm)", Contact Type=MalePin, Datasheet URL=http://www.te.com/commerce/DocumentDelivery/DDEController?Action=showdoc&DocId=Customer+Drawing%7F280370%7FM1%7Fpdf%7FEnglish%7FENG_CD_280370_M1.pdf%7F280371-2, Datasheet Version="Rev. M1, 08/2016", Dynamic Catalog=AMPMODUModIISeries, Family=RectangularConnectors-Headers,MalePins, Manufacturer URL=http://www.te.com/, Mounting Technology=ThroughHole, Mounting Type=ThroughHole, Number of Positions=4, Number of Positions Loaded=All, Number of Rows=1, Other Names="280371-2-ND / A106401", Package Reference=280371-2, Packaging=Bulk, Pitch="0.100\"(2.54mm)", RoHS Information=280371-2StatementofCompliance, Series=AMPMODUModII, Termination=Solder
P2 P3: library part CMP-1502-02410-1, "Serie 3114 - 7.62mm Close Vertical PCB Header WR-TBL, 4 pin", Manufacturer="Wurth Elektronik", Operating Temperature=-40to105degC, Datasheet URL=http://katalog.we-online.de/em/datasheet/6913114001xx.pdf, Gender=Male, Manufacturer URL=http://www.we-online.de, Mounting Technology=THT, Package Reference=691311400104, Packaging=Box, PART NUMBER=691311400104, Pin Number=4, Pitch=7.62mm, Publisher=WurthElektronik
PS1 PS2 PS3 PS4: "DC/DC-Converter, 2kV, 4kVDC & 6kVDC Isolation. Continuous Short Circuit Protection", Package=None, Availability=Unavailable, MP=REC5-2415SRWZ/H6/A, Price=None
Q1 Q2 Q3 Q4: library part CMP-1166-00078-1, "1200 V IGBT in Trench and Fieldstop Technology with Soft, Fast Recovery Anti-Parallel Diode, 80 A IC, -40 to 175 degC, PG-TO247-3-44, Tube, Green", Manufacturer=Infineon, PartNumber=IKW40N120H3, Switching Frequency="HighSpeed3 20-100kHz", ComponentLink1Description="Manufacturer URL", ComponentLink1URL=http://www.infineon.com/, ComponentLink2Description=Datasheet, ComponentLink2URL=http://www.infineon.com/dgdl/IKW40N120H3_Rev1_2G.pdf?folderId=db3a30431c69a49d011c6f86019b00a1&fileId=db3a304325305e6d012591d4832f7032, ComponentLink3Description="Package Specification", ComponentLink3URL=http://www.infineon.com/cms/packages/Leaded_and_through-hole/P-PG-TO247/P-PG-TO247-3-44.html?__locale=en, DatasheetVersion="Rev. 1.2", Eoff (typ)="1.2Â mJ", Eon (typ)="3.2 mJ", Green=TRUE, Halogen-free=available, IC(max) @ 25degrees="80Â A", IC(max) @ 100degrees="40Â A", ICpuls (max)="160 A", IF (max)="40 A", IFpuls (max)="160 A", Irrm (typ)="12.8 A", Mounting Technology="Through Hole", PackageDescription="3-Pin Plastic (Green) Transistor Single Outline Package, 15.94 x 20.95 mm Body, 5.44 mm Pitch", PackageReference=PG-TO247-3-44, PackageVersion="Rev. 03", Packing=Tube, QGate (typ)="185 nC", Qrr (typ)="1.9 uC", td(off) (typ)="290 ns", td(on) (typ)="30 ns", tf (typ)="16Â ns", tr (typ)="57 ns", VCE (max)="1,200Â V", VCE(sat) (typ)="2.05Â V", VF (typ)="2.4 V"
Q5: library part CMP-18360-000002-1, "IC OPAMP ISOLATION 100KHZ 8SO", Case/Package=SOIC, Forward Current=230mA, Input Bias Current=1.5nA, Input Offset Voltage (Vos)=300uV, Isolation Voltage=5kV, Max Operating Temperature=105°C, Max Supply Voltage=5.5V, Min Operating Temperature=-40°C, Min Supply Voltage=4.5V, Nominal Supply Current=15mA, Operating Supply Current=10.5mA, Operating Supply Voltage=5V, Output Current per Channel=30mA, Package Quantity=1000, -3db Bandwidth=100kHz, Bandwidth=100kHz, Mount="Surface Mount", Number of Channels=1, Number of Circuits=1, Number of Pins=8, Packaging="Tape and Reel", Propagation Delay=6500ns, Radiation Hardening=No, Turn-On Delay Time=6500ns
R1 R5 R10 R17 R23 R26 R27 R28 R33 R34 R48 R56 R57 R58 R60 R61 R62 R74 R80 R82 R83 R84 R87 R88 R92 R93 R94 R98 R99 R100 R101 R102 R103 R104 R105 R107 R113 R115 R116 R117 R119 R122 R131 R134 R135 R137 R138 R139 R140 R141 R142 R144 R145 R146 R160 R167 R168 R171 R172: library part ResSMD
R3 R4 R6 R8 R12 R16 R18 R19 R20 R21 R25 R29 R40 R45 R47 R49 R50 R51 R53 R59 R63 R68 R71 R73 R75 R76 R77 R78 R81 R85 R90 R96 R106 R108 R109 R110 R111 R114 R118 R123 R124 R136 R154 R162 R163: "Resistor", Published=8-Jun-2000, Publisher="Altium Limited"
  R3 R4 R6 R8 R12 R16 R20 R21 R25 R29 R40 R45 R47 R51 R53 R59 R63 R68 R71 R73 R77 R78 R81 R85 R90 R96 R106 R110 R111 R114 R118 R123 R124 R154 R162 R163: LatestRevisionDate=29-May-2009, LatestRevisionNote="IPC-7351 Footprint Added.", PackageDescription="Chip Resistor", PackageReference=J1-0603
  R18 R19 R49 R50 R75 R76 R108 R109 R136: LatestRevisionDate=17-Jul-2002, LatestRevisionNote="Re-released for DXP Platform.", PackageDescription="Axial Device, Thru-Hole; 2 Leads; 0.3 in Pin Spacing", PackageReference=AXIAL-0.3
R7 R9 R31 R32 R37 R38 R39 R41 R42 R43 R52 R54 R67 R69 R89 R91: library part "Res Semi", "Semiconductor Resistor", LatestRevisionDate=17-Jul-2002, LatestRevisionNote="Re-released for DXP Platform.", PackageDescription="Axial Device, Thru-Hole; 2 Leads; 0.5 in Pin Spacing", PackageReference=AXIAL-0.5, Published=8-Jun-2000, Publisher="Altium Limited"
R13 R22 R30 R35 R36 R46 R55 R64 R65 R66 R72 R79 R86 R97 R112 R120: library part Res1, "Resistor", LatestRevisionDate=17-Jul-2002, LatestRevisionNote="Re-released for DXP Platform.", PackageDescription="Axial Device, Thru-Hole; 2 Leads; 0.3 in Pin Spacing", PackageReference=AXIAL-0.3, Published=8-Jun-2000, Publisher="Altium Limited"
R121: library part Res, "resistor 1/4 wat"
R125: library part "Res Varistor", "Varistor (Voltage-Sensitive Resistor)", Code_IPC=RESC2012, LatestRevisionDate=29-May-2009, LatestRevisionNote="IPC-7351 Footprint Added.", PackageDescription="Chip Resistor 0805 Case Size", PackageReference=6-0805, PackageVersion=Mar-2003, Published=24-Mar-1999, Publisher="Altium Limited"
R126 R127 R129 R130 R132 R133: library part CMP-1014-00542-3, "RES Thick Film, 2kΩ, 1%, 0.25W, 100ppm/°C, 1206", Case Code (Imperial)=1206, Case Code (Metric)=3216, Max Operating Temperature=155°C, Max Power Dissipation=250mW, Min Operating Temperature=-55°C, Package Quantity=10, Resistance=2kR, Temperature Coefficient=100ppm/°C, Tolerance=1%, Voltage Rating=200V, Case/Package=1206, Composition="Thick Film", Contact Plating=Tin, Depth=1.6mm, Features="Automotive AEC-Q200", Height=0.55mm, Length=3.2mm, Military Standard=Not, Mount="Surface Mount", Number of Pins=2, Number of Terminations=2, Packaging="Tape and Reel", Power Rating=250mW, Radiation Hardening=No, Termination=SMD/SMT, Weight=0.000353oz, Width=1.6mm
TP1 TP2 TP3 TP4 TP5 TP6 TP7 TP8 TP9 TP10 TP11 TP12 TP13 TP14 TP15 TP16 TP17 TP18 TP19 TP20 TP21 TP22 TP23 TP24 TP25 TP26 TP27 TP28 TP29 TP30 TP31 TP32 TP33 TP34 TP35 TP36 TP37 TP38 TP39 TP40 TP41 TP42 TP43 TP44 TP45 TP46 TP47 TP48 TP49 TP50 TP51 TP52 TP53 TP54 TP55 TP56 TP57 TP58 TP59 TP60 TP61 TP62 TP63 TP64 TP65 TP66 TP67 TP68 TP69 TP70 TP71 TP72 TP73 TP74 TP75 TP76 TP77 TP78 TP79 TP80 TP81 TP82 TP83 TP84 TP85 TP86 TP87: library part "Con1 pin-Small"
U1: library part MINMAX-MJWI20
U2 U4 U7 U10 U13: library part CMP-0859-00388-5, "IC BUF NON-INVERT 5.5V SC70-5", Case/Package=SC, High Level Output Current=-32mA, Low Level Output Current=32mA, Max Operating Temperature=125°C, Max Supply Voltage=5.5V, Min Operating Temperature=-40°C, Min Supply Voltage=1.65V, Package Quantity=1, Quiescent Current=1.5uA, Contact Plating=Gold, Lead Free="Lead Free", Logic Function="Schmitt Trigger", Mount="Surface Mount", Number of Bits=1, Number of Bits per Element=1, Number of Channels=1, Number of Elements=1, Number of Gates=1, Number of Input Lines=1, Number of Inputs=1, Number of Output Lines=1, Number of Outputs=1, Number of Pins=5, Packaging="Tape and Reel", Polarity=Non-Inverting, Propagation Delay=11ns, Radiation Hardening=No, REACH SVHC="No SVHC", Termination=SMD/SMT, Turn-On Delay Time=11ns
U3: library part PC817
U5 U8 U11 U14: library part CMP-0512-00083-1, "Led Emulator Input, 4.0 A Isolated Gate Drivers, 5 to 30 V Driver Supply, 5 kVRMS Isolation Rating, -40 to 125 degC, 6-pin SOP", Isolation Rating (Input-Output, kVrms)=5, Manufacturer="Silicon Labs", PartNumber=Si8261BBD-C-IS, UVLO Voltage="8 V", 10kV surge=TRUE, ComponentLink1Description="Manufacturer URL", ComponentLink1URL=http://www.silabs.com/, ComponentLink2Description=Datasheet, ComponentLink2URL=http://www.silabs.com/Support%20Documents/TechnicalDocs/Si826x.pdf, ComponentLink3Description="Package Specification", ComponentLink3URL=http://www.silabs.com/Support%20Documents/TechnicalDocs/Si826x.pdf, DatasheetVersion="Rev. 0.9", Driver Supply="5 to 30 V", Max. Prop. Delay (ns)=60, Mounting Technology="Surface Mount", Overlap Protection & Dead Time Control=FALSE, PackageDescription="6-Pin SDIP, Body 4.58 x 7.5 mm, Pitch 1.27 mm", PackageReference=SDIP6, Sub-Family=ISOdrivers
U6 U9 U12 U15: library part CMP-1550-00001-1, "9-Ampere Low-Side Ultrafast MOSFET Driver, 4.5 to 35 V, 200 KOhm, -40 to 125 degC, 8-Pin SOIC (SI), RoHS, Tube", PartNumber=IXDN609SI, Temperature Max="125 degC", Temperature Min="-40 degC", ComponentLink1Description="Manufacturer URL", ComponentLink1URL=http://www.ixys.com/, ComponentLink2Description=Datasheet, ComponentLink2URL=http://www.ixysic.com/home/pdfs.nsf/www/IXD_609.pdf/$file/IXD_609.pdf, ComponentLink3Description="Package Specification", ComponentLink3URL=http://www.ixysic.com/home/pdfs.nsf/www/IXD_609.pdf/$file/IXD_609.pdf, Mounting Technology="Surface Mount", Number of Configurations=1, Number of Outputs=1, PackageDescription="8-Pin Small Outline Integrated Circuit Package, Body 4.928 x 3.937 mm, Pitch 1.27 mm", Packing=Tube, REN Typ="200 kOhm", RoHS=TRUE, VCC Max="35 V", VCC Min="4.5 V"
U16: "3 A, Fast Transient Response, Low Noise, LDO Regulator, 2.7 to 20 V Vin, 3.3 V Vout, 5-pin DPAK (Q-5), -40 to 125 degC", Dropout Voltage(V)=0.34, Manufacturer="Linear Technology", Output Voltage="3.3 V", Shutdown Current(uA)=0.01, Supplier Part Number 1=LT1764AEQ-3.3-ND, ComponentLink1Description="Manufacturer URL", ComponentLink1URL=http://www.linear.com/, ComponentLink2Description=Datasheet, ComponentLink2URL=http://cds.linear.com/docs/en/datasheet/1764afb.pdf, ComponentLink3Description="Package Specification", ComponentLink3URL=http://cds.linear.com/docs/en/packaging/Q%20DD5%2005-08-1461%20Rev%20F.pdf, DatasheetVersion="Rev. B", Discrete Pass Element=no, Iout(mA)=3000, Isupply(mA)=1, Mounting Technology="Surface Mount", Noise(uV)=40, Number of Outputs=1, PackageDescription="5-Pin Plastic DD Pak, Body 10.2235 x 8.89 mm, Pitch 1.702 mm", PackageReference=Q-5, PackageVersion="Rev. F, 09/2011", PartNumber=LT1764AEQ-3.3, PSRR(dB)=63, RoHS=FALSE, Supplier 1=Digi-Key, Supplier 2=Newark, Supplier Part Number 2=57M6104, Vin Max(V)=20, Vin Min(V)=2.7
U17: "Current Transducer, 5 V, -40 to 85 degC, 10-Pin THD, RoHS, Tray", Manufacturer=LEM, Operating Temperature Range="-40 to 85 degC", PartNumber="LTSR 15-NP", CL="500 pF Max.", ComponentLink1Description="Manufacturer URL", ComponentLink1URL=http://www.lem.com/, ComponentLink2Description=Datasheet, ComponentLink2URL=http://www.lem.com/docs/products/ltsr%2015-np.pdf, ComponentLink3Description="Package Specification", ComponentLink3URL=http://www.lem.com/docs/products/ltsr%2015-np.pdf, DatasheetVersion=Feb-11, G="41.6 mV/A", IP="250 At", IPN="15 At", Mounting Technology="Through Hole", PackageDescription="10-Pin THD, Body 22.2 x 9.3 mm, Height 24 mm", Packing=Tray, VC="5 V"
U19: library part CMP-0272-00853-3, "Precision, 20 MHz, 0.9 pA Ib, RRIO, CMOS Operational Amplifier, 1.8 to 5.5 V, -40 to 125 degC, 5-pin SOT23 (DBV5), Green (RoHS & no Sb/Br)", Manufacturer="Texas Instruments", PartNumber=OPA320AIDBVR, Total Supply Voltage(Max)(+5V is 5, +/-5V is 10)=5.5, Total Supply Voltage(Min)(+5V is 5, +/-5V is 10)=1.8, CMRR(Min)(dB)=100, Code_JEDEC=MO-178, ComponentLink1Description="Manufacturer URL", ComponentLink1URL=http://www.ti.com/, ComponentLink2Description=Datasheet, ComponentLink2URL=http://www.ti.com/general/docs/lit/getliterature.tsp?genericPartNumber=OPA320&fileType=pdf, ComponentLink3Description="Package Specification", ComponentLink3URL=http://www.ti.com/litv/pdf/mpds018i, DatasheetVersion=SBOS513D, Eco-Plan="Green (RoHS & no Sb/Br)", IIB(Max)(pA)=0.9, Iq per channel(Max)(mA)=1.75, Mounting Technology="Surface Mount", Number of Channels=2, Offset Drift(Typ)(uV/C)=1.5, PackageDescription="5-Pin Plastic Small Outline, Body 1.6 x 2.9 mm, Pitch 0.95 mm", PackageReference=DBV0005A, PackageVersion="4073253-4/K, 03/2006", Slew Rate(Typ)(V/us)=10, Sub Family="High Output Current Amplifier (>=50mA), Low Input Bias Current Amp (<=10pA), Low Noise Amp (<=10nV/rtHz), Low Offset Voltage Amplifier (<=500uV), Low Supply Voltage Amplifier (<=2.7V), Precision Amplifier", Vio (25C)(Max)(mV)=0.15, Vn at 1kHz(Typ)(nV/rtHz)=8.5
U20: library part CMP-1679-00012-1, "Low Noise Low Drop Out (LDO) Linear Voltage Regulator, 3.3 V Output Voltage, 150 mA, -40 to 85 degC, 5-Pin SOT-23 (1212-01), Pb-Free, Tape and Reel", ComponentLink1Description="Manufacturer URL", ComponentLink1URL=http://www.onsemi.com/, ComponentLink2Description=Datasheet, ComponentLink2URL=http://www.onsemi.com/pub_link/Collateral/MC78PC00-D.PDF, DatasheetVersion="Rev. 6, 06/2005", PackageDescription="5-Pin Small Outline Transistor, Body 2.9 x 1.65 mm, Pitch 0.95 mm", PackageReference=SOT-23-5-1212-01_O
U21: library part CMP-0272-01600-3, "Ultra-Low Noise Precision Operational Amplifier, 8 to 44 V, -40 to 85 degC, 8-pin DIP (P8), Green (RoHS & no Sb/Br)", Manufacturer="Texas Instruments", Rating=Catalog, Total Supply Voltage(Max)(+5V is 5, +/-5V is 10)=44, Total Supply Voltage(Min)(+5V is 5, +/-5V is 10)=8, CMRR(Min)(dB)=100, Code_JEDEC=MS-001, ComponentLink1Description="Manufacturer URL", ComponentLink1URL=http://www.ti.com/, ComponentLink2Description=Datasheet, ComponentLink2URL=http://www.ti.com/lit/ds/symlink/opa27.pdf, ComponentLink3Description="Package Specification", ComponentLink3URL=http://www.ti.com/litv/pdf/mpdi001b, DatasheetVersion=SBOS135C, Eco-Plan="Green (RoHS & no Sb/Br)", GBW(Typ)(MHz)=8, IIB(Max)(pA)=80000, Iq per channel(Max)(mA)=5.7, Mounting Technology="Through Hole", Number of Channels=1, Offset Drift(Typ)(uV/C)=0.4, PackageDescription="8-Pin Plastic In-Line, Body 9.59 x 6.35 mm, Pitch 2.54 mm", PackageReference=P0008A, PackageVersion="4040082/E, 04/2010", Packing=TUBE, PartNumber=OPA27GP, Slew Rate(Typ)(V/us)=1.9, Sub Family="High Supply Voltage Amplifier (>=30V), Low Noise Amp (<=10nV/rtHz), Low Offset Voltage Amplifier (<=500uV), Precision Amplifier", Vio (25C)(Max)(mV)=0.1
L1: Code_IEC=1005, Code_JEITA=0402, LatestRevisionDate=29-May-2009, LatestRevisionNote="IPC-7351 Footprint Added.", PackageDescription="Chip Inductor", PackageReference=0402-A, Published=8-Jun-2000, Publisher="Altium Limited"

## Free pads (board coordinates)
  round 236.22 hole 125.98: 0(157.48,157.48) 0(157.48,6535.43) 0(5409.45,5299.21) 0(6933.07,157.48) 0(8716.54,5279.53) 0(9287.4,6527.56) 0(14803.15,6535.43) 0(14803.15,157.48)